# Altium PCB SmartDevice.PcbDoc
Units mil, origin at the board's own origin, x right, y up, seen from the top; angles counter-clockwise.
Board outline 6000 x 4000 mil, 2 copper layers (Top Layer, Bottom Layer); 12 components, 24 nets, 83 pads, 0 vias.
Unrouted connection lines stored in the file: 38.
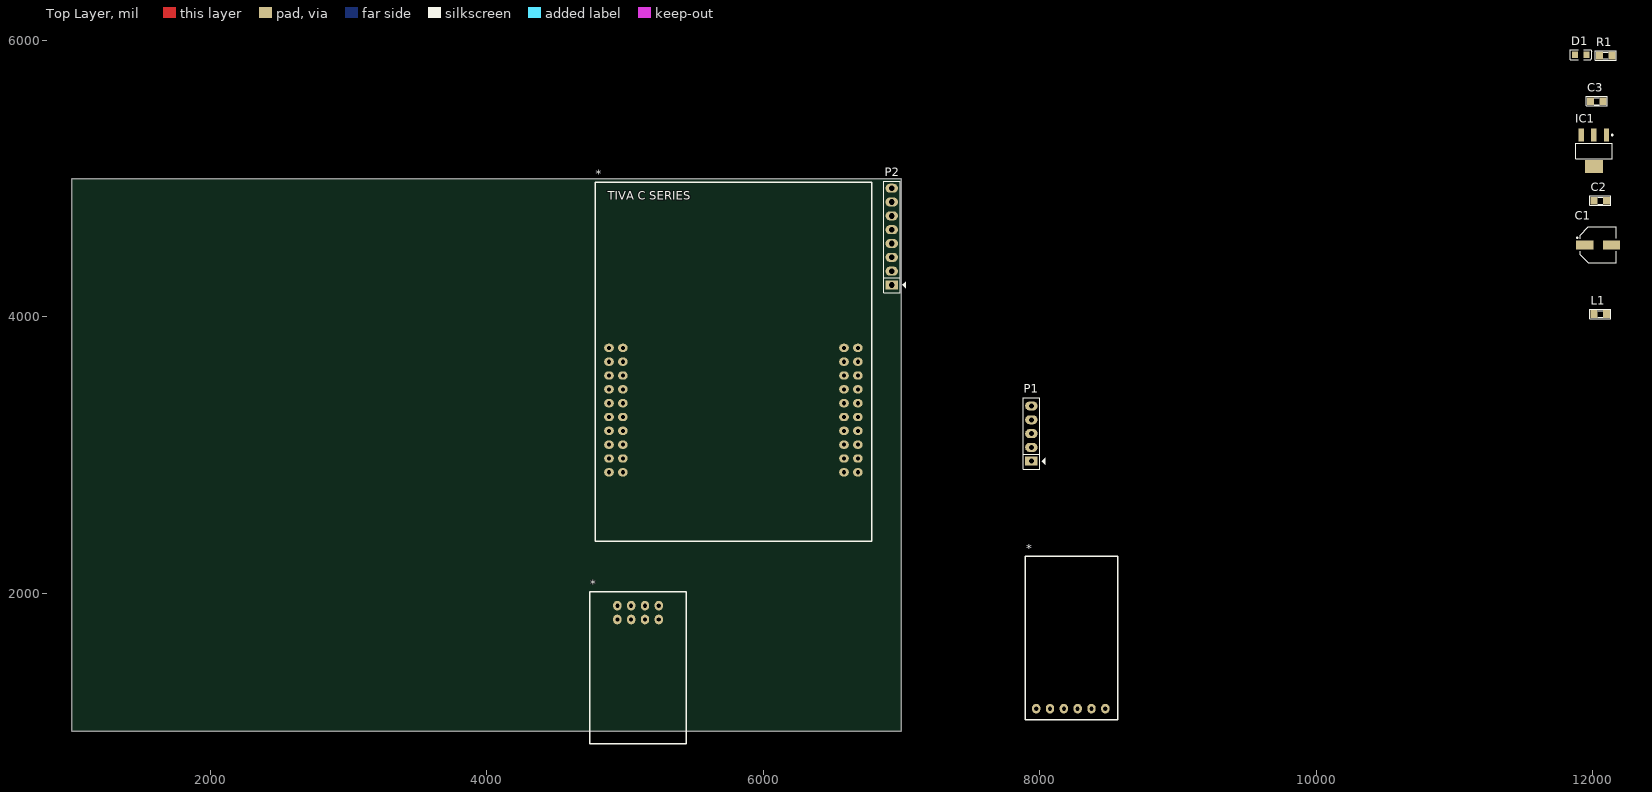
[diagram p0: Top Layer view]
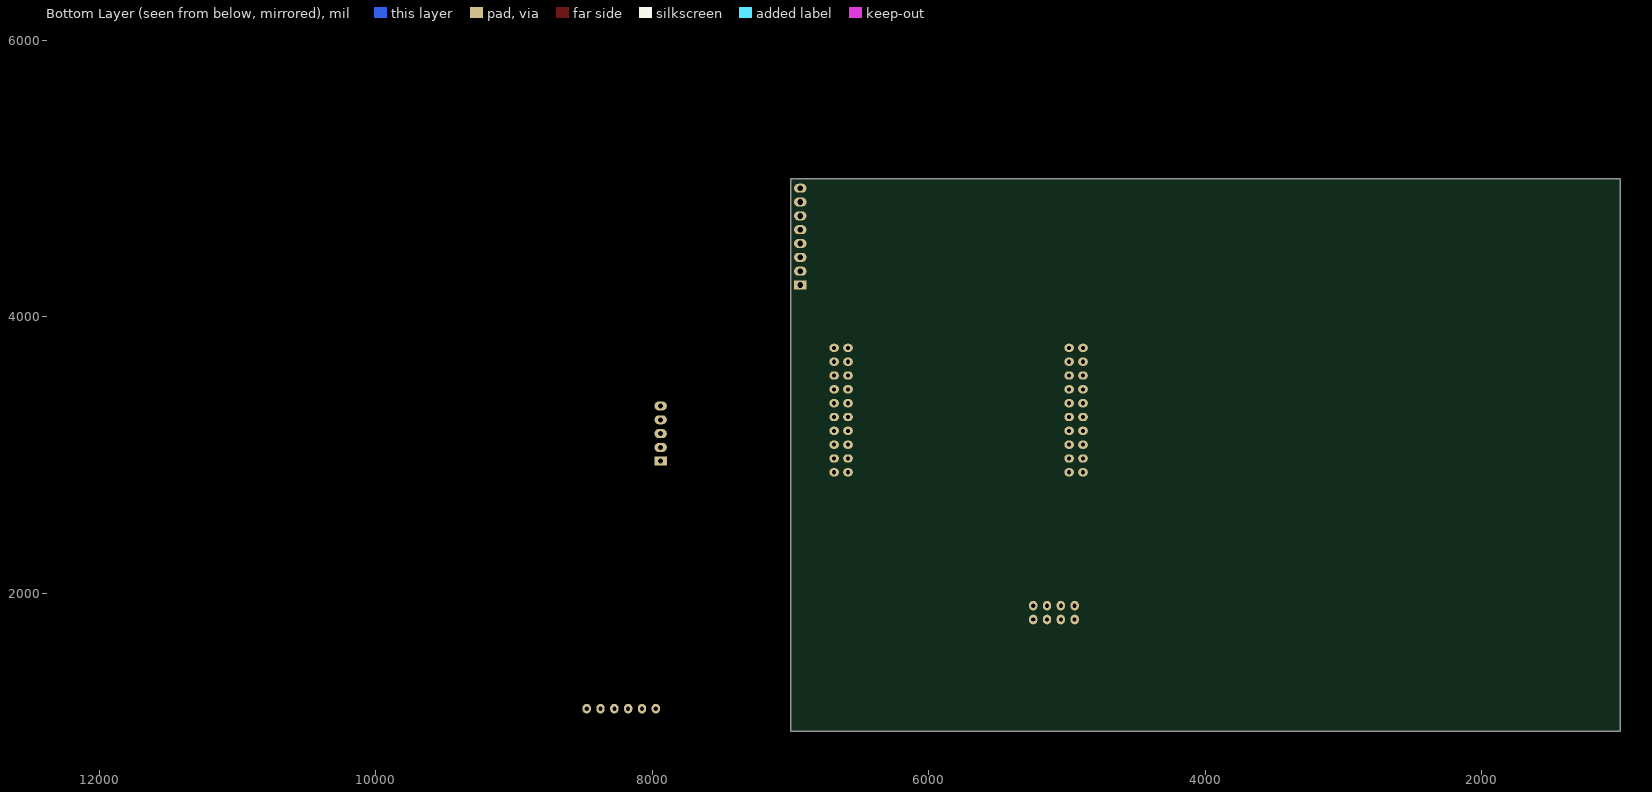
[diagram p1: Bottom Layer view, seen from below]

## Layer stack, top to bottom
Top Solder: solder mask 0.4, Solder Resist, Dk 3.5
Top Layer: signal copper 1.4
Dielectric 1: dielectric 12.6, FR-4, Dk 4.8
Bottom Layer: signal copper 1.4
Bottom Solder: solder mask 0.4, Solder Resist, Dk 3.5

## Board outline
1000,1000 7000,1000 7000,5000 1000,5000

## Design rules (kind name [scope] priority, off if disabled: settings)
Clearance [All] p1: gap=10
PolygonConnect [All] p1: connectstyle=Relief reliefconductorwidth=10 reliefentries=4 polygonreliefangle="90 Angle" airgapwidth=10
RoutingVias [All] p1: holewidth=28 width=50 viastyle="Through Hole" minholewidth=28 minwidth=50 maxholewidth=28 maxwidth=50
SolderMaskExpansion [All] p1: expansion=4
Width [All] p1: maxlimit=10 minlimit=10 preferedwidth=10
30 further rules are at their usual default settings.

## Classes and differential pairs
component class SmartDevice: * C1 C2 C3 D1 IC1 L1 P1 P2 R1

## Components (designator, comment, footprint, x,y, rotation, side; value= is the part's Value field where it differs from the comment)
* "hc06" PCBComponent_1 7975,1165 r90 top
* "ESP8266V1" ESP8266V1 5245,1910 r270 top
* "tiva c series" "TIVA C" 4785,2375 r0 top
C1 "Cap Pol SMD" "CAP ALU SIZE D" 12040,4520 r0 top
C2 "Cap Non-Pol SMD" CAP-SM-0805 12100,4840 r180 top
C3 "Cap Non-Pol SMD" CAP-SM-0805 12075,5560 r180 top
D1 "LED SMD" LED_0805_Blue 11915,5895 r0 top
IC1 "LM1117" SOT223-4N 12010,5200 r270 top
L1 "RESISTOR SMD" RES-SM-0805 12100,4020 r180 top
P1 "Header 5" JP5 7940,2955 r90 top
P2 "Header 8" JP8 6930,4230 r90 top
R1 "RESISTOR SMD" RES-SM-0805 12050,5890 r0 top

## Footprints (in the part's own frame and the unit in brackets; to place one, negate y for a bottom-side part, rotate by r counter-clockwise, add the part's x,y. Pads: shape width x height; smd on the part's side, far side on the other; paste and mask are expansions set on the pad)
"CAP ALU SIZE D" [mm] "Capacitor, Aluminium Electrolytric, 6.6mm L X 6.6mm W X 5.4mm H, IPC Medium Density"
  rect 3.15x1.6 smd: 1(-2.45,0) 2(2.45,0)
  silkscreen extent -3.95,-3.3 3.3,3.3, body extent -3.9,-3.4 3.9,3.4, height 5.7
CAP-SM-0805 [mil]
  rect 50x55 smd: 1(0,0) 2(90,0)
  silkscreen extent -32,-34 121,33, body extent 6,-25 84,25, height 31
ESP8266V1 [mil]
  oval 70x60 hole 30: 0(0,0) 1(0,-100) 2(0,-200) 3(0,-300) 4(100,0) 5(100,-100) 6(100,-200) 7(100,-300)
  silkscreen extent -100,-500 1000,200
JP5 [mil] "JP5"
  rect 65x90 hole 36: 1(0,0)
  oval 65x90 hole 36: 2(100,0) 3(200,0) 4(300,0) 5(400,0)
  silkscreen extent -57,-101 461,60, body extent -48,-53 448,45, height 323
JP8 [mil] "JP8"
  rect 65x90 hole 42: 1(0,0)
  oval 65x90 hole 42: 2(100,0) 3(200,0) 4(300,0) 5(400,0) 6(500,0) 7(600,0) 8(700,0)
  silkscreen extent -56,-100 752,57, body extent -48,-50 748,48, height 323
LED_0805_Blue [mm] "Chip LED, 2-Leads, Body 2.0x1.3mm, IPC Medium Density"
  rect 1.1x1.2 smd: 1(-1.05,0) 2(1.05,0)
  silkscreen extent -1.91,-0.89 2.03,0.89, body extent -1,-0.63 1,0.62, height 0.68
PCBComponent_1 [mil]
  oval 70x60 hole 30: 0(0,0) 1(0,-100) 2(0,-200) 3(0,-300) 4(0,-400) 5(0,-500)
  silkscreen extent -79,-591 1102,79
RES-SM-0805 [mil]
  rect 50x55 smd: 1(0,0) 2(90,0)
  silkscreen extent -32,-34 121,33, body extent 6,-25 84,25, height 31
SOT223-4N [mm] "SOT223, 4-Leads, Body 6.5x3.5mm, Pitch 2.3mm, Lead Span 7mm, IPC Medium Density"
  rect 2.4x1 smd: 1(-2.9,2.3) 2(-2.9,0) 3(-2.9,-2.3)
  rect 2.4x3.3 smd: 4(2.9,0)
  silkscreen extent -3.02,-3.35 1.4,3.48, body extent -3.39,-3.27 3.5,3.23, height 1.72
"TIVA C" [mil]
  oval 70x60 hole 30: 0(100,1400) 1(100,1300) 2(100,1200) 3(100,1100) 4(100,1000) 5(100,900) 6(100,800) 7(100,700) 8(100,600) 9(100,500) 10(200,1400) 11(200,1300) 12(200,1200) 13(200,1100) 14(200,1000) 15(200,900) 16(200,800) 17(200,700) 18(200,600) 19(200,500) 20(1900,1400) 21(1900,1300) 22(1900,1200) 23(1900,1100) 24(1900,1000) 25(1900,900) 26(1900,800) 27(1900,700) 28(1900,600) 29(1900,500) 30(1800,1400) 31(1800,1300) 32(1800,1200) 33(1800,1100) 34(1800,1000) 35(1800,900) 36(1800,800) 37(1800,700) 38(1800,600) 39(1800,500)
  silkscreen extent 0,0 2000,2600

## Part data
C1: "Polarized Capacitor (Radial)"
C2 C3: "Capacitor"
D1: "LED"
IC1: "Available in 1.8V, 2.5V, 2.85V, 3.3V, 5V, and  Adjustable Versions"
L1 R1: "Resistor"
P1: "Header, 5-Pin"
P2: "Header, 8-Pin"

## Nets (pads, with @x,y where several pads share a name; then routed paths per layer and width w, separated by ;. In a path a pad name is that pad's centre, name@x,y a point inside that pad or via, vN(x,y) a via of type N, cw(c..) or ccw(c..) an arc to the next point about the centre after c; other vN are vias at no path point)
3.3V: *.3@4945,1910 C3.2 D1.1 IC1.2 IC1.4 P2.1
B0_MCLR: *.2@4885,3575 P1.1
B1_CS: *.3@4885,3475 P1.2
B2_SDO: *.21 P1.3
B3_SDI: *.32 P1.4
B4_CLK: *.6@4885,3175 P1.5
E4_TX: *.0@5245,1910 *.4@4885,3375
E5_RX: *.5@4885,3275 *.7@4945,1810
GND: *.2@8175,1165 *.4@5245,1810 *.20 C1.2 C2.1 C3.1 IC1.1 P2.2 R1.1
NetC1_1: C1.1 C2.2 IC1.3 L1.2
NetD1_2: D1.2 R1.2
PC4_TX: *.3@8275,1165 *.33
PC5_RX: *.4@8375,1165 *.34
PD0_RELAY0: *.12 P2.3
PD1_RELAY1: *.13 P2.4
PD2_RELAY2: *.14 P2.5
PD3_RELAY3: *.15 P2.6
PD7_KEY: *.0@7975,1165 *.38
PE1_RELAY4: *.16 P2.7
PE2_RELAY5: *.17 P2.8
PE3_STATE: *.5@8475,1165 *.18
PF1_RST: *.2@5045,1910 *.19
PF4_CH_PD: *.1@5145,1910 *.39
VBUS: *.1@8075,1165 *.10 L1.1
pads on no net: *.0@4885,3775 *.1@4885,3675 *.5@5145,1810 *.6@5045,1810 *.7@4885,3075 *.8 *.9 *.11 *.22 *.23 *.24 *.25 *.26 *.27 *.28 *.29 *.30 *.31 *.35 *.36 *.37

## Text inside footprints (layer, text, board x,y; h text height)
*: Top Overlay "TIVA C SERIES" at 4875,4845.01 h60